# Altium PCB PCB1.PcbDoc
Units mm, origin at the board's own origin, x right, y up, seen from the top; angles counter-clockwise.
Board outline 78.23 x 33.87 mm, 2 copper layers (Top Layer, Bottom Layer); 19 components, 28 nets, 97 pads, 5 vias.
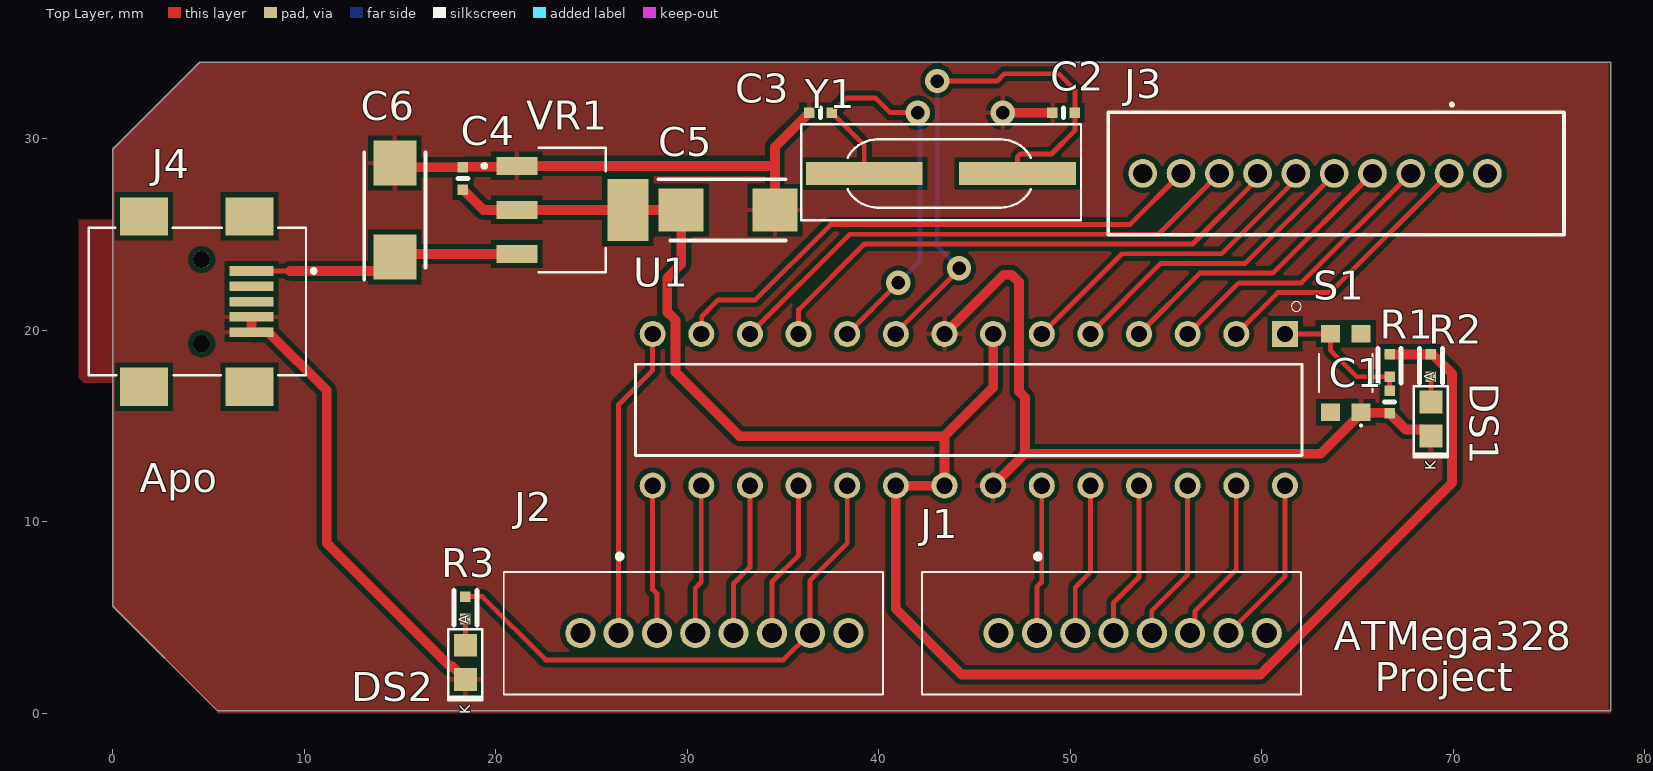
[diagram p0: Top Layer view]
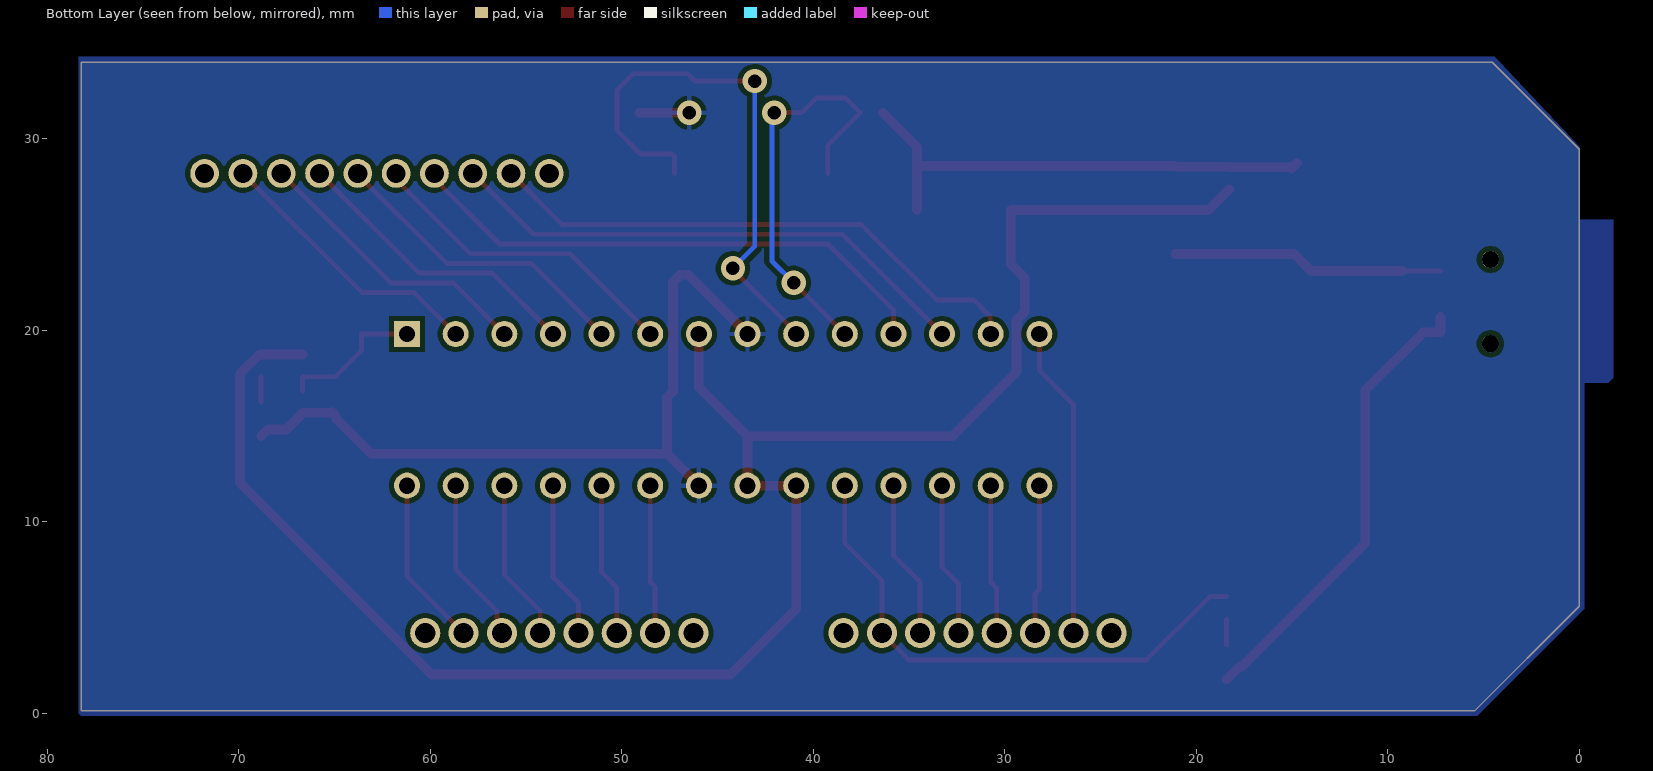
[diagram p1: Bottom Layer view, seen from below]
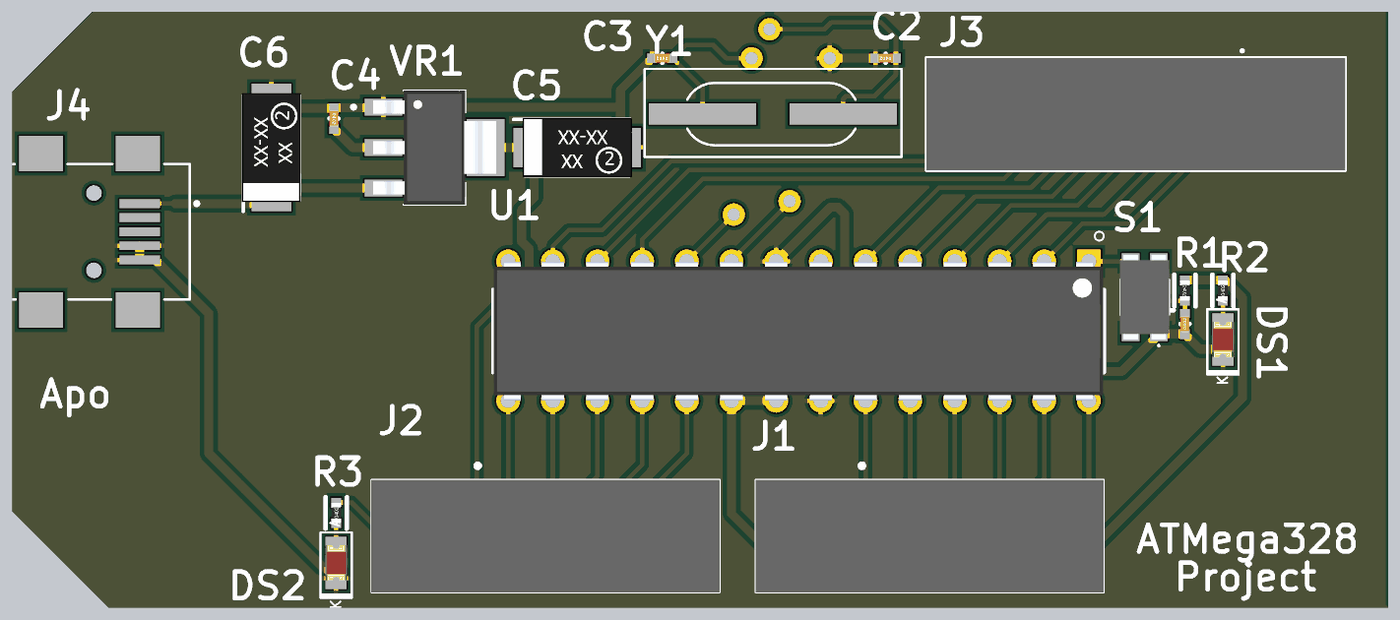
[diagram p2: 3D render of the assembled board from above, using the file's embedded part models]

## Layer stack, top to bottom
Top Solder: solder mask 0.0102, Solder Resist, Dk 3.5
Top Layer: signal copper 0.0356
Dielectric 1: dielectric 0.32, FR-4, Dk 4.8
Bottom Layer: signal copper 0.0356
Bottom Solder: solder mask 0.0102, Solder Resist, Dk 3.5

## Board outline
5.461,0.127 0,5.588 0,29.464 4.536,34 78.232,34 78.232,0.127

## Design rules (kind name [scope] priority, off if disabled: settings)
Clearance [All] p1: gap=0.254 ignorepadtopadclearanceinfootprint=TRUE except(0: Arc-Hole Track-Hole SMDPad-Hole THPad-Hole Via-Hole Fill-Hole Poly-Hole Region-Hole Text-Hole)
PolygonConnect [All] p1: connectstyle=Relief reliefconductorwidth=0.254 reliefentries=4 polygonreliefangle="90 Angle" airgapwidth=0.254
RoutingVias [All] p1: holewidth=100 width=1.27 viastyle="Through Hole" minholewidth=0.25 minwidth=1.27 maxholewidth=0.711 maxwidth=1.27
SolderMaskExpansion [All] p1: expansion=0.102 istentingtop=FALSE
Width [All] p1: maxlimit=100 minlimit=0.152 preferedwidth=0.254 minimp=50.000000 maximp=50.000000 favimp=50.000000
30 further rules are at their usual default settings.

## Components (designator, comment, footprint, x,y, rotation, side; value= is the part's Value field where it differs from the comment)
C1 "0.10µF" SMD-0402C 66.675,16.256 r0 top
C2 "22pF" SMD-0402C 49.657,31.369 r90 top
C3 "22pF" SMD-0402C 36.957,31.369 r90 top
C4 "0.10µF" SMD-0402C 18.288,27.94 r180 top
C5 "293D476X9010C2TE3" CAPPM6032X280N 32.131,26.289 r0 top
C6 "293D476X9010C2TE3" CAPPM6032X280N 14.732,26.289 r90 top
DS1 "LED BLUE" LED_0805 68.834,15.367 r90 top
DS2 "RED LED" LED_0805 18.415,2.667 r90 top
J1 "XN2D-1671" XN2D1671 48.261,4.191 r0 top
J2 "XN2D-1671" XN2D1671 26.417,4.191 r0 top
J3 "XN2D-1871" XN2D1871 69.785,28.194 r180 top
J4 "1734035-4" J_SMD_1734035-4-5_0.8_9.9_8.85_3.9 4.639,21.501 r270 top
R1 "10k" SMD-0402-RES 66.675,18.161 r180 top
R2 "270" SMD-0402-RES 68.834,18.161 r0 top
R3 "270" SMD-0402-RES 18.415,5.512 r0 top
S1 "KMR241NGLFS" KMR241NGLFS 64.389,17.78 r90 top
U1 "ATMEGA328P-PU" DIP794W46P254L2967H457Q28B 44.704,15.852 r270 top
VR1 "LM1117MPX-ADJ/NOPB" VREG_LM1117MPX-ADJ/NOPB 24.003,26.289 r0 top
Y1 "ABLS7M-16.000MHZ-B-2-T" XTAL_314_240X47_SMD 39.244,28.194 r0 top

## Footprints (in the part's own frame and the unit in brackets; to place one, negate y for a bottom-side part, rotate by r counter-clockwise, add the part's x,y. Pads: shape width x height; smd on the part's side, far side on the other; paste and mask are expansions set on the pad)
CAPPM6032X280N [mm]
  rect 2.35x2.25 smd: 1(-2.45,0) 2(2.45,0)
  silkscreen extent -3.62,-1.6 3,1.6, body extent -3.1,-1.67 3.1,1.68, height 2.54
DIP794W46P254L2967H457Q28B [mm]
  rect 1.358x1.358 hole 0.85: 1(-3.96,16.51)
  round 1.358 hole 0.85: 2(-3.96,13.97) 3(-3.96,11.43) 4(-3.96,8.89) 5(-3.96,6.35) 6(-3.96,3.81) 7(-3.96,1.27) 8(-3.96,-1.27) 9(-3.96,-3.81) 10(-3.96,-6.35) 11(-3.96,-8.89) 12(-3.96,-11.43) 13(-3.96,-13.97) 14(-3.96,-16.51) 15(3.96,-16.51) 16(3.96,-13.97) 17(3.96,-11.43) 18(3.96,-8.89) 19(3.96,-6.35) 20(3.96,-3.81) 21(3.96,-1.27) 22(3.96,1.27) 23(3.96,3.81) 24(3.96,6.35) 25(3.96,8.89) 26(3.96,11.43) 27(3.96,13.97) 28(3.96,16.51)
  silkscreen extent -5.65,-17.4 2.38,17.4, body extent -3.95,-17.34 3.95,17.34, height 4.57
J_SMD_1734035-4-5_0.8_9.9_8.85_3.9 [mm]
  rect 0.5x2.3 smd: 1(-1.6,2.6) 2(-0.8,2.6) 3(0,2.6) 4(0.8,2.6) 5(1.6,2.6)
  rect 2x2.5 smd: S1(-4.45,2.5) S2(4.45,2.5) S3(-4.45,-3) S4(4.45,-3)
  round 0.9 hole 0.9 unplated: ""(-2.2,0) ""(2.2,0)
  silkscreen extent -3.85,-5.9 3.85,5.95
KMR241NGLFS [mm]
  rect 0.9x1 smd: 1(-2.05,-0.8) 2(2.05,-0.8) 3(2.05,0.8) 4(-2.05,0.8)
  silkscreen extent -2.8,-1.4 1,1.4, body extent -2.41,-1.4 2.41,1.4, height 2
LED_0805 [mm] "LED"
  rect 1.2x1.2 smd mask+0.076: A(0.889,0) K(-0.889,0)
  silkscreen extent -1.99,-0.89 1.73,0.89, body extent -1.01,-0.62 1.01,0.63, height 1.1
SMD-0402-RES [mm]
  rect 0.55x0.55 smd: 1(0,0.584) 2(0,-0.584)
  silkscreen extent -0.6,-0.9 0.6,0.9, body extent -0.28,-0.57 0.27,0.58, height 0.41
SMD-0402C [mm]
  rect 0.55x0.55 smd: 1(0,0.584) 2(0,-0.584)
  silkscreen extent -0.25,0 0.25,0, body extent -0.25,-0.51 0.25,0.51, height 0.51
VREG_LM1117MPX-ADJ/NOPB [mm]
  rect 2.15x0.95 smd: 1(-2.9,2.3) 2(-2.9,0) 3(-2.9,-2.3)
  rect 2.15x3.25 smd: 4(2.9,0)
  silkscreen extent -4.7,-3.25 1.75,3.25, body extent -3.5,-3.25 3.5,3.25, height 1.8
XN2D1671 [mm]
  round 1.575 hole 1.05: 1(0,0) 2(2,0) 3(4,0) 4(6,0) 5(8,0) 6(10,0) MH1(-2,0) MH2(12,0)
  silkscreen extent -6,-3.2 13.8,4.05, body extent -6,-3.2 13.8,3.2, height 13.1
XN2D1871 [mm]
  round 1.5 hole 1: 1(0,0) 2(2,0) 3(4,0) 4(6,0) 5(8,0) 6(10,0) 7(12,0) 8(14,0) MH1(-2,0) MH2(16,0)
  silkscreen extent -6,-3.65 17.8,3.2, body extent -6,-3.2 17.8,3.2, height 13.1
XTAL_314_240X47_SMD [mm] "CASE: TH"
  rect 6.096x1.2 smd: 1(0,0) 2(8,0)
  silkscreen extent -3.29,-2.44 11.32,2.57, body extent -2.99,-2.27 10.9,2.41, height 3.05

## Part data
C1 C4: library part GCM155R71C104KA55D, "CAP CER 0.1UF 16V X7R 0402", Digi-Key Part Number=490-4759-1-ND, Manufacturer="Murata Electronics North America", Operating Temperature="-55°C ~ 125°C", Package / Case="0402 (1005 Metric)", Ratings=AEC-Q200, Temperature Coefficient=X7R, Tolerance=±10%, Voltage=16V, @ qty=0, Applications=Automotive, Datasheets=http://www.murata.com/~/media/webrenewal/support/library/catalog/products/capacitor/mlcc/c03e.ashx, Factory Stock=0, Features=-, Height - Seated (Max)=-, Image=//media.digikey.com/Renders/Murata%20Renders/ZRB-SERIES-0402.jpg, Lead Spacing=-, Lead Style=-, Minimum Quantity=1, Mounting Type="Surface Mount, MLCC", Packaging="Cut Tape (CT)", Part Number=GCM155R71C104KA55D, Part Status=Active, Quantity Available=734194, Series=GCM, Size / Dimension="0.039\" L x 0.020\" W (1.00mm x 0.50mm)", Thickness (Max)="0.022\" (0.55mm)", Unit Price (USD)=0.1
C2 C3: library part GRM1555C1E220GA01D, "CAP CER 22PF 25V NP0 0402", Digi-Key Part Number=490-8173-1-ND, Manufacturer="Murata Electronics North America", Operating Temperature="-55°C ~ 125°C", Package / Case="0402 (1005 Metric)", Ratings=-, Temperature Coefficient="C0G, NP0", Tolerance=±2%, Voltage=25V, @ qty=0, Applications="General Purpose", Datasheets=http://www.murata.com/~/media/webrenewal/support/library/catalog/products/capacitor/mlcc/c02e.pdf, Factory Stock=0, Features=-, Height - Seated (Max)=-, Image=//media.digikey.com/Renders/Murata%20Renders/ZRB-SERIES-0402.jpg, Lead Spacing=-, Lead Style=-, Minimum Quantity=1, Mounting Type="Surface Mount, MLCC", Packaging="Cut Tape (CT)", Part Number=GRM1555C1E220GA01D, Part Status=Active, Quantity Available=165276, Series=GRM, Size / Dimension="0.039\" L x 0.020\" W (1.00mm x 0.50mm)", Thickness (Max)="0.022\" (0.55mm)", Unit Price (USD)=0.1
C5 C6: "Capacitor Polarised", Manufacturer_Name=Vishay, Mouser Part Number=74-293D476X9010C2TE3, Arrow Part Number=293D476X9010C2TE3, Arrow Price/Stock=https://www.arrow.com/en/products/293d476x9010c2te3/vishay, Datasheet Link=http://www.vishay.com/docs/40002/293d.pdf, Height=2.8mm, Manufacturer_Part_Number=293D476X9010C2TE3, Mouser Price/Stock=https://www.mouser.co.uk/ProductDetail/Vishay-Sprague/293D476X9010C2TE3?qs=L4BSZja3YaLjW7yb5EwZTw%3D%3D
DS1: library part LED_BLUE-3V3-20mA-0805, "Blue 470nm LED Indication - Discrete 3.3V 0805 (2012 Metric)", Alternate Part Number-1=NA, Case/Package=0805, Manufacturer="Vishay Lite-On", Manufacturer Part Number=LTST-C171TBKT, Supplier Part Number-1=LTST-C171TBKT, Supplier-1="SP ROAD"
DS2: library part LED_RED-2V-20mA-0805, "Red 631nm LED Indication - Discrete 2V 0805 (2012 Metric)", Alternate Part Number-1=NA, Case/Package=0805, Manufacturer="Vishay Lite-On", Manufacturer Part Number=LTST-C171KRKT, Supplier Part Number-1=LTST-C171KRKT, Supplier-1="SP ROAD"
J1 J2: "Connector", Manufacturer_Name="Omron Electronics", Mouser Part Number=653-XN2D-1671, Datasheet Link=https://componentsearchengine.com/Datasheets/1/XN2D-1671.pdf, Height=13mm, Manufacturer_Part_Number=XN2D-1671, Mouser Price/Stock=https://www.mouser.co.uk/ProductDetail/Omron-Electronics/XN2D-1671/?qs=HnaUIVfgVjDqExZIAnw1oQ%3D%3D
J3: "Connector", Manufacturer_Name="Omron Electronics", Datasheet Link=https://datasheet.datasheetarchive.com/originals/distributors/Datasheets_SAMA/5a7ce62f2dc56be3f4960af2e1972c5d.pdf, Height=13mm, Manufacturer_Part_Number=XN2D-1871
J4: "Conn Mini USB 2.0 Type B RCP 5 POS 0.8mm Solder RA SMD 5 Terminal 1 Port Automotive T/R", Package=None, Availability=Unavailable, MF="{'manufacturer': u'TE Connectivity'}", MP=1734035-4, Price=None
R1: library part ERJ-2GEJ103X, "RES SMD 10K OHM 5% 1/10W 0402", Digi-Key Part Number=P10KJCT-ND, Manufacturer="Panasonic Electronic Components", Operating Temperature="-55°C ~ 155°C", Package / Case="0402 (1005 Metric)", Power (Watts)="0.1W, 1/10W", Supplier Device Package=0402, Temperature Coefficient=±200ppm/°C, Tolerance=±5%, @ qty=1500, Composition="Thick Film", Datasheets=http://industrial.panasonic.com/www-cgi/jvcr13pz.cgi?E+PZ+3+AOA0001+ERJ2GEJ103X+7+WW, Factory Stock=0, Failure Rate=-, Features="Automotive AEC-Q200", Height - Seated (Max)="0.016\" (0.40mm)", Image=//media.digikey.com/Photos/Panasonic%20Photos/ERJ-PA2-Series.jpg, Minimum Quantity=1, Number of Terminations=2, Packaging="Cut Tape (CT)", Part Number=ERJ-2GEJ103X, Part Status=Active, Quantity Available=2560215, Series=ERJ, Size / Dimension="0.039\" L x 0.020\" W (1.00mm x 0.50mm)", Unit Price (USD)=0.00350
R2 R3: library part ERJ-2RKF2700X, "RES SMD 270 OHM 1% 1/10W 0402", Digi-Key Part Number=P270LCT-ND, Manufacturer="Panasonic Electronic Components", Operating Temperature="-55°C ~ 155°C", Package / Case="0402 (1005 Metric)", Power (Watts)="0.1W, 1/10W", Supplier Device Package=0402, Temperature Coefficient=±100ppm/°C, Tolerance=±1%, @ qty=1500, Composition="Thick Film", Datasheets=http://industrial.panasonic.com/www-cgi/jvcr13pz.cgi?E+PZ+3+AOA0002+ERJ2RKF2700X+7+WW, Factory Stock=0, Failure Rate=-, Features="Automotive AEC-Q200", Height - Seated (Max)="0.016\" (0.40mm)", Image=//media.digikey.com/Photos/Panasonic%20Photos/ERJ-PA2-Series.jpg, Minimum Quantity=1, Number of Terminations=2, Packaging="Cut Tape (CT)", Part Number=ERJ-2RKF2700X, Part Status=Active, Quantity Available=74905, Series=ERJ, Size / Dimension="0.039\" L x 0.020\" W (1.00mm x 0.50mm)", Unit Price (USD)=0.00496
S1: "Switch", Manufacturer_Name="C & K COMPONENTS", Mouser Part Number=611-KMR241NGLFS, Arrow Part Number=KMR241NGLFS, Arrow Price/Stock=https://www.arrow.com/en/products/kmr241nglfs/ck, Datasheet Link=https://www.ckswitches.com/media/1479/kmr2.pdf, Height=1.9mm, Manufacturer_Part_Number=KMR241NGLFS, Mouser Price/Stock=https://www.mouser.co.uk/ProductDetail/CK/KMR241NGLFS?qs=sb%252But3Lm4x3MOq2auuFbeg%3D%3D
U1: "ATmega Series 20 MHz 32 KB Flash 2 KB SRAM 8-Bit Microcontroller - DIP-28", Package=None, Availability=Unavailable, MF="{'manufacturer': u'Microchip Technology'}", MP=ATMEGA328P-PU, Price=None
VR1: "800-mA 15-V linear voltage regulator 4-SOT-223 0 to 125  <a href=\"https://pricing.snapeda.com/parts/LM1117MPX-ADJ/NOPB/Texas%20Instruments/view-part?ref=eda\">Check availability</a> <a href=\"https://pricing.snapeda.com/parts/LM1117MPX-ADJ/NOPB/Texas%20Instruments/view-part?ref=eda\">Check availability</a>", Package=None, Availability=Unavailable, MF="{'manufacturer': u'Texas Instruments'}", MP=LM1117MPX-ADJ/NOPB, Price=None
Y1: library part XTAL_16MHz-ABLS7M-16.000MHZ-B-2-T, "16MHz ±20ppm Crystal 18pF 60 Ohms 2-SMD, Flat Lead", Alternate Part Number-1=NA, Case/Package=SMD, Manufacturer=Abracon, Manufacturer Part Number=ABLS7M-16.000MHZ-B-2-T, Supplier Part Number-1=ABLS7M-16.000MHZ-B-2-T, Supplier-1=ARROW

## Via types
v1: diameter 1.27, hole 0.711, Top Layer to Bottom Layer, 5 vias

## Nets (pads, with @x,y where several pads share a name; then routed paths per layer and width w, separated by ;. In a path a pad name is that pad's centre, name@x,y a point inside that pad or via, vN(x,y) a via of type N, cw(c..) or ccw(c..) an arc to the next point about the centre after c; other vN are vias at no path point)
1: C1.1 R1.1 S1.3 U1.1 | length 7.6
  Top Layer w0.254: U1.1 63.571,19.812 S1.3 63.589,18.961 64.973,17.577 R1.1 C1.1
+5: C4.1 C5.1 R1.2 R2.1 U1.7 U1.20 U1.21 VR1.2 VR1.4 | length 98.2
  Top Layer w0.508: C4.1 19.355,26.289 VR1.2 VR1.4 C5.1 29.681,23.458 28.956,22.733 28.956,20.955 29.381,20.53 29.381,17.824 32.727,14.478 43.434,14.478 ; U1.7 45.974,17.018 43.434,14.478 ; R1.2 R2.1 68.855,18.724 68.955,18.724 69.942,17.737 69.942,12.04 59.934,2.032 44.323,2.032 40.894,5.461 U1.20 U1.21 43.434,14.478
A0: J1.1 U1.23 | length 7.8
  Top Layer w0.254: J1.1 48.261,6.605 48.514,6.858 U1.23
A1: J1.2 U1.24 | length 8
  Top Layer w0.254: J1.2 50.261,6.573 51.054,7.366 U1.24
A2: J1.3 U1.25 | length 8.3
  Top Layer w0.254: J1.3 52.261,5.779 53.594,7.112 U1.25
A3: J1.4 U1.26 | length 8.5
  Top Layer w0.254: J1.4 54.261,5.366 56.134,7.239 U1.26
A4: J1.5 U1.27 | length 8.7
  Top Layer w0.254: J1.5 56.514,4.444 56.514,5.333 58.674,7.493 U1.27
A5: J1.6 U1.28 | length 9.1
  Top Layer w0.254: J1.6 58.261,4.54 58.61,4.54 61.214,7.144 U1.28
D2: J3.3 U1.4 | length 15.7
  Top Layer w0.254: U1.4 56.769,22.987 60.578,22.987 J3.3
D3: J3.4 U1.5 | length 16.2
  Top Layer w0.254: U1.5 54.737,23.495 59.138,23.495 63.785,28.142 J3.4
D4: J3.5 U1.6 | length 16.9
  Top Layer w0.254: U1.6 52.705,24.003 57.912,24.003 61.785,27.876 J3.5
D5: J3.6 U1.11 | length 28.4
  Top Layer w0.254: U1.11 35.814,21.082 39.243,24.511 56.388,24.511 59.785,27.908 J3.6
D6: J3.7 U1.12 | length 28
  Top Layer w0.254: U1.12 38.481,25.019 54.61,25.019 J3.7
D7: J3.8 U1.13 | length 29
  Top Layer w0.254: U1.13 30.756,19.834 30.756,20.723 31.623,21.59 33.553,21.59 37.49,25.527 53.118,25.527 J3.8
D8: J2.1 U1.14 | length 16.4
  Top Layer w0.254: J2.1 26.417,16.13 28.194,17.907 U1.14
D9: J2.2 U1.15 | length 7.8
  Top Layer w0.254: U1.15 28.194,6.477 28.417,6.254 J2.2
D10: J2.3 U1.16 | length 7.8
  Top Layer w0.254: J2.3 30.417,6.541 30.734,6.858 U1.16
D11: J2.4 U1.17 | length 8.1
  Top Layer w0.254: J2.4 32.417,6.763 33.274,7.62 U1.17
D12: J2.5 U1.18 | length 8.3
  Top Layer w0.254: J2.5 34.417,6.858 35.814,8.255 U1.18
D13: J2.6 R3.1 U1.19 | length 28.5
  Top Layer w0.254: R3.1 19.304,6.096 22.606,2.794 35.02,2.794 J2.6 36.417,6.953 38.354,8.89 U1.19
GND: C1.2 C2.1 C3.1 C4.2 C5.2 C6.2 DS1.K DS2.K J4.4 J4.5 S1.1 U1.8 U1.22 VR1.1 | length 92.1
  Top Layer w0.508: J4.4 J4.5 8.131,19.901 11.176,16.856 11.176,8.877 17.605,2.448 17.745,2.448 DS2.K ; C6.2 15.023,28.448 15.099,28.524 C4.2 18.309,28.545 21.059,28.545 VR1.1 34.567,28.589 34.581,28.575 ; C5.2 34.581,28.575 ; C3.1 34.581,29.577 34.581,28.575 ; U1.8 46.526,22.904 46.946,22.904 47.327,22.523 47.327,16.808 47.644,16.491 47.644,13.562 ; U1.22 47.644,13.562 ; v1(46.482,31.369) C2.1 ; DS1.K 68.488,14.824 67.523,14.824 C1.2 66.654,15.693 65.226,15.693 S1.1 65.139,15.73 64.943,15.534 64.943,15.416 63.09,13.562 47.644,13.562
NetC2_2: C2.2 U1.9 Y1.2 | length 29.3
  Top Layer w0.254: U1.9 40.894,19.875 44.196,23.177 v1(44.196,23.241) ; v1(43.053,33.02) 46.175,33.02 46.556,33.401 49.403,33.401 50.241,32.563 C2.2 50.241,30.429 49.022,29.21 47.393,29.21 47.244,29.061 Y1.2
  Bottom Layer w0.254: v1(43.053,33.02) 43.053,24.384 v1(44.196,23.241)
NetC3_2: C3.2 U1.10 Y1.1 | length 22.2
  Top Layer w0.254: U1.10 v1(41.021,22.479) ; Y1.1 39.244,29.666 C3.2 38.303,32.131 39.842,32.131 40.604,31.369 v1(42.037,31.369)
  Bottom Layer w0.254: v1(41.021,22.479) 42.164,23.622 42.164,31.242 v1(42.037,31.369)
NetDS1_A: DS1.A R2.2 | length 1.3
  Top Layer w0.254: DS1.A R2.2
NetDS2_A: DS2.A R3.2 | length 1.4
  Top Layer w0.254: DS2.A R3.2
RX: J3.1 U1.2 | length 14.6
  Top Layer w0.254: U1.2 60.833,21.971 63.562,21.971 J3.1
TX: J3.2 U1.3 | length 15.1
  Top Layer w0.254: U1.3 58.801,22.479 62.07,22.479 J3.2
VCC: C6.1 J4.1 VR1.3 | length 14.2
  Top Layer w0.254: J4.1 9.258,23.101
  Top Layer w0.508: 9.258,23.101 13.994,23.101 C6.1 14.882,23.989 VR1.3
pads on no net: J1.MH1 J1.MH2 J2.MH1 J2.MH2 J3.MH1 J3.MH2 J4. J4.2 J4.3 J4.S1 J4.S2 J4.S3 J4.S4 S1.2 S1.4

## Polygon pours and split planes (outlines as drawn)
GND on Top Layer "GND_L01_P000" (solid, pour order 0): 4.572,34.036 4.608,34 78.105,34 78.105,0.254 78.359,0 5.461,0 5.461,0.127 0,5.588 0,17.272 -1.524,17.272 -1.778,17.526 -1.778,25.781 0,25.781 0,29.591 0.163,29.591 4.572,34
GND on Bottom Layer "GND_L02_P001" (solid, pour order 1): 4.318,34.163 4.445,34.29 78.359,34.29 78.359,0 78.232,-0.127 5.334,-0.127 -0.254,5.461 -0.254,17.272 -1.524,17.272 -1.778,17.526 -1.778,25.781 0,25.781 0,29.591 4.155,34

## Silkscreen, mask and mechanical layers (free items; w line width, h text height)
Top Overlay:
  text "Apo" at 1.397,11.557 h1.52
  text "ATMega328" at 63.754,3.302 h1.52
  text "Project" at 65.913,1.143 h1.52
Mechanical 1:
  lines w1: 0,5.588 5.461,0.127 78.232,0.127 78.232,4.953 78.232,34 4.536,34 0,29.464 0,5.588

## Text inside footprints (layer, text, board x,y; h text height)
DS1: Top Overlay "A" at 69.009,17.354 h0.51 r90; Top Overlay "K" at 69.088,12.7 h0.56 r90
DS2: Top Overlay "A" at 18.59,4.654 h0.51 r90; Top Overlay "K" at 18.665,-0.058 h0.56 r90
J4: Mechanical 13 "PCB EDGE" at -0.5,24.16 h0.81 r270